# EAGLE board supply (EAGLE 4.16)

Size 160 x 100 mm. Coordinates in mm from the lower left corner, seen from the top.
Outline: 0,0 160,0 160,100 0,100 0,0
Copper layers (1*16): Top 0.035mm / dielectric 1.5mm / Bottom 0.035mm
Design rules "default": minimum track width 10mil, minimum drill 24mil, track to track 8mil, track to pad 8mil, pad to pad 8mil, via to via 8mil, smd to smd 8mil, copper to edge 40mil, drill to drill 8mil, minimum pad ring 10mil, minimum via ring 8mil, stop-mask expansion 4mil, vias tented up to drill 0mil, thermal gap 10mil

## Footprints (pad centres in the part's own frame; a part is rotated, then mirrored left to right if it is on the bottom)
CAP2.5 = drill 0.813 pad 1.6 octagon: 1 -2.54,0; 2 0,0
C1206 = smd 1.6 x 1.8: 1 -1.4,0; 2 1.4,0
C0805K = smd 1.3 x 1.6: 1 -1,0; 2 1,0
E3,5-10 = drill 0.813 pad 1.6 round: + -1.778,0 | drill 0.813 pad 1.6 octagon: - 1.778,0
PANASONIC_E = smd 3.8 x 1.4: + 3,0; - -3,0
PANASONIC_D = smd 3 x 1.4: + 2.4,0; - -2.4,0
SOT23 = smd 1 x 1.4: 1 -0.95,-1.1; 2 0.95,-1.1; 3 0,1.1
SMB = smd 2.4 x 2.4: A 2.2,0; C -2.2,0
DIL_TRACO_DCDC = drill 0.813 long: 1 -13.97,-7.62; 2 -11.43,-7.62; 3 -8.89,-7.62; 9 6.35,-7.62; 10 8.89,-7.62; 11 11.43,-7.62; 12 13.97,-7.62; 13 13.97,7.62; 14 11.43,7.62; 15 8.89,7.62; 16 6.35,7.62; 22 -8.89,7.62; 23 -11.43,7.62; 24 -13.97,7.62
DC_DC_TRACO_1W_DUAL = drill 0.9 round: 1 -5.08,3.81; 2 -2.54,3.81; 3 2.54,3.81; 4 5.08,3.81; 5 7.62,3.81
SOT23-5 = smd 0.6 x 1.2: 1 -0.95,-1.306; 2 0,-1.306; 3 0.95,-1.306; 4 0.95,1.306; 5 -0.95,1.306
SO8 = smd 0.6 x 2.2: 1 -1.905,-2.6; 2 -0.635,-2.6; 3 0.635,-2.6; 4 1.905,-2.6; 5 1.905,2.6; 6 0.635,2.6; 7 -0.635,2.6; 8 -1.905,2.6
SO14W = smd 0.6 x 2.2: 1 -3.81,-4.6; 2 -2.54,-4.6; 3 -1.27,-4.6; 4 0,-4.6; 5 1.27,-4.6; 6 2.54,-4.6; 7 3.81,-4.6; 8 3.81,4.6; 9 2.54,4.6; 10 1.27,4.6; 11 0,4.6; 12 -1.27,4.6; 13 -2.54,4.6; 14 -3.81,4.6
78LXX = drill 0.813 octagon: GND 0,1.905; IN 1.27,0; OUT -1.27,0
SNR-V = drill 1.3 round: 11 7.62,1.27; 12 2.54,1.27; 14 12.7,1.27 | drill 1 round: A1 -12.7,1.27; A2 -8.89,1.27
L5650M = smd 1.8 x 4: 1 -2.5,0; 2 2.5,0
IND_KOA_330U = smd 2 x 1: P$1 0,0; P$2 0,2.5; P$3 0,5; P$4 0,7.5; P$5 12.5,0; P$6 12.5,2.5; P$7 12.5,5; P$8 12.5,7.5
1206 = smd 1.6 x 1.803: A -1.422,0; C 1.422,0
AMP1_2_DC = drill 1.9 round: 1 9.15,16.72; 2 13.34,16.73 | hole 3.2: 4.62,12.49; 17.88,12.49
NEB25R = drill 0.813 pad 2.54 long: + 0,7.35; - 0,1.35; C 4.9,4.4
DPAK = smd 1.6 x 2.997: 1 -2.261,-4.928; 3 2.21,-4.928 | smd 4.826 x 4.191: 4 0,3.353
R0805W = smd 1.5 x 1: 1 -0.94,0; 2 0.94,0
R2010W = smd 2 x 1.8: 1 -2.311,0; 2 2.311,0
M0805 = smd 1.3 x 1.6: 1 -0.95,0; 2 0.95,0
TESTPAD = drill 1.321 pad 2.159 octagon: 1 0,0

## Placement (x,y rotation side)
C1  47u/50  [CAP2.5]  -52.71,56.35 0 top  (outside the outline)
C2  47u/50  [CAP2.5]  -62.87,56.35 0 top  (outside the outline)
C3  100n  [C1206]  -31.12,66.51 0 top  (outside the outline)
C4  100n  [C1206]  -42.55,66.51 0 top  (outside the outline)
C5  47u/25  [CAP2.5]  -73.03,56.35 0 top  (outside the outline)
C6  47u/25  [CAP2.5]  -83.19,56.35 0 top  (outside the outline)
C7  47u/25  [CAP2.5]  -93.35,56.35 0 top  (outside the outline)
C8  100n  [C1206]  -53.98,66.51 0 top  (outside the outline)
C9  100n  [C1206]  -65.41,66.51 0 top  (outside the outline)
C10  100n  [C1206]  -76.84,66.51 0 top  (outside the outline)
C11  100n  [C1206]  -88.27,66.51 0 top  (outside the outline)
C12  100n  [C0805K]  -74.3,74.13 0 top  (outside the outline)
C13  220p  [C1206]  -99.7,66.51 0 top  (outside the outline)
C14  470p  [C1206]  -111.13,66.51 0 top  (outside the outline)
C15  NM  [C1206]  -122.56,66.51 0 top  (outside the outline)
C16  470p  [C1206]  -18.42,74.13 0 top  (outside the outline)
C17  220uF  [E3,5-10]  -22.23,47.46 0 top  (outside the outline)
C18  100p  [C1206]  -29.85,74.13 0 top  (outside the outline)
C19  330uF  [E3,5-10]  -37.47,47.46 0 top  (outside the outline)
C20  100n  [C1206]  -41.28,74.13 0 top  (outside the outline)
C21  100u/50V  [PANASONIC_E]  -104.78,46.19 0 top  (outside the outline)
C22  220u/16V  [PANASONIC_D]  -106.05,57.62 0 top  (outside the outline)
C23  100n  [C0805K]  -84.46,74.13 0 top  (outside the outline)
C24  100n  [C0805K]  -94.62,74.13 0 top  (outside the outline)
C25  470uF  [E3,5-10]  -52.71,47.46 0 top  (outside the outline)
C26  100n  [C0805K]  -104.78,74.13 0 top  (outside the outline)
C27  100n  [C0805K]  -114.94,74.13 0 top  (outside the outline)
C28  4u7  [E3,5-10]  -67.95,47.46 0 top  (outside the outline)
D1  BZX84-C12  [SOT23]  -128.91,46.19 0 top  (outside the outline)
D2  15MQ040  [SMB]  -118.75,57.62 0 top  (outside the outline)
D3  BAS16  [SOT23]  -118.75,46.19 0 top  (outside the outline)
D4  LL4001G  [SMB]  -131.45,57.62 0 top  (outside the outline)
IC1  DC_DC_TRACO_8W  [DIL_TRACO_DCDC]  -32.39,14.44 0 top  (outside the outline)
IC2  DC_DC_TRACO_1W_DUAL  [DC_DC_TRACO_1W_DUAL]  -117.48,30.95 0 top  (outside the outline)
IC3  LM4120  [SOT23-5]  -78.11,46.19 0 top  (outside the outline)
IC4  LTC1622  [SO8]  -85.73,34.76 0 top  (outside the outline)
IC5  LM2574M-5  [SO14W]  -109.86,9.36 0 top  (outside the outline)
IC6  L7805CP  [78LXX]  -43.82,56.35 0 top  (outside the outline)
K1  SNR03024  [SNR-V]  -60.33,33.49 0 top  (outside the outline)
L1  3u3H  [L5650M]  -89.54,46.19 0 top  (outside the outline)
L2  330uH  [IND_KOA_330U]  -69.22,4.28 0 top  (outside the outline)
LED1  [1206]  -52.71,74.13 0 top  (outside the outline)
P1  [AMP1_2_DC]  -137.8,-8.42 0 top  (outside the outline)
P2  NEB25R  [NEB25R]  -94.62,8.09 0 top  (outside the outline)
Q1  IRFR5305  [DPAK]  -79.38,10.63 0 top  (outside the outline)
Q2  BSS123  [SOT23]  -18.42,57.62 0 top  (outside the outline)
Q3  BSS123  [SOT23]  -28.58,57.62 0 top  (outside the outline)
R1  10k  [R0805W]  -126.37,74.13 0 top  (outside the outline)
R2  10k  [R0805W]  -19.69,81.75 0 top  (outside the outline)
R3  2k2  [R0805W]  -31.12,81.75 0 top  (outside the outline)
R4  2k2  [R0805W]  -42.55,81.75 0 top  (outside the outline)
R5  0R  [R2010W]  -18.42,66.51 0 top  (outside the outline)
R6  2k2  [R0805W]  -53.98,81.75 0 top  (outside the outline)
R7  2k2  [R0805W]  -65.41,81.75 0 top  (outside the outline)
R8  180R  [M0805]  -64.14,74.13 0 top  (outside the outline)
T1  IRF7422  [SO8]  -97.16,34.76 0 top  (outside the outline)
U$240  TESTPAD  [TESTPAD]  -19.69,34.76 0 top  (outside the outline)
U$398  TESTPAD  [TESTPAD]  -33.66,34.76 0 top  (outside the outline)

## Library data of the parts
C1 C2 C5-C7 D3 IC1 IC2 IC4 IC5 L2 P1 Q1 T1 = sc-librari
C3 C4 C8-C28 L1 R1-R8 = rcl
D1 D2 D4 = diode
IC3 U$240 U$398 = lbm
IC6 = v-reg
K1 = relay
LED1 = led
P2 = con-lumberg
Q2 Q3 = transistor-small-signal

## Nets
0V: C1.2 C2.2 C3.2 C4.2 C5.2 C6.2 C7.1 C8.2 C9.2 C10.1 C11.2 C12.1 C12.2 C13.2 C14.2 C15.2 C16.2 C17.- C18.2 C19.- C20.2 C25.- C26.1 C27.1 C28.- IC1.2 IC1.3 IC1.10 IC1.12 IC1.13 IC1.15 IC1.16 IC2.2 IC2.4 IC3.2 IC4.6 IC6.GND P1.2 P2.+ Q2.2 Q3.2 R3.1 R7.1 T1.1 T1.2 U$240.1
+3V3: C19.+ C20.1 C25.+ C26.2 D4.C IC6.IN L1.2 R6.2
+5V: C6.1 C9.1 C11.1 IC2.5 IC3.3 IC3.4
+24S: K1.11
+24V: C1.1 C3.1 C5.1 C8.1 C21.+ C24.2 D3.3 IC1.1 IC1.22 IC1.23 IC1.24 IC2.1 IC5.10 K1.14 K1.A1 Q1.4
-5V: C7.2 C10.2 IC2.3
GND: C21.- C22.- C23.1 C24.1 D2.A IC5.4 IC5.5 IC5.6 R8.2
N$11: D3.1 K1.A2 Q3.3
N$29: D4.A P2.-
N$52: D2.C IC5.12 L2.P$1
N$55: LED1.C R8.1
N$148: D1.3 P1.1 Q1.3 R1.2
N$149: Q2.3 R2.1
N$152: Q1.1 R1.1 R2.2
N$153: D1.1 Q2.1 R3.2
N$155: IC4.1 R5.1 T1.3
N$156: IC4.7 T1.4
N$158: IC4.2 R4.1
N$159: C13.1 R4.2
N$160: L1.1 T1.5 T1.6 T1.7 T1.8
N$161: C14.1 IC4.4
N$162: C18.1 IC4.3 R6.1 R7.2
N$307: IC3.1
N$308: IC4.5
N$309: K1.12
REF: IC3.5
RELAY_24V: Q3.1
VCC: C2.1 C4.1 C15.1 C16.1 C17.+ C22.+ C23.2 C27.2 C28.+ IC1.11 IC1.14 IC4.8 IC5.3 IC6.OUT L2.P$4 LED1.A R5.2 U$398.1

## Tracks (layer width: path | path; a pad name or v marks a point on that pad's centre or on a via)
0V  (45 unrouted)
+3V3  (7 unrouted)
+5V  (5 unrouted)
+24V  (15 unrouted)
-5V  (2 unrouted)
GND  (8 unrouted)
N$11  (2 unrouted)
N$29  (1 unrouted)
N$52  (2 unrouted)
N$55  (1 unrouted)
N$148  (3 unrouted)
N$149  (1 unrouted)
N$152  (2 unrouted)
N$153  (2 unrouted)
N$155  (2 unrouted)
N$156  (1 unrouted)
N$158  (1 unrouted)
N$159  (1 unrouted)
N$160  (4 unrouted)
N$161  (1 unrouted)
N$162  (3 unrouted)
VCC  (17 unrouted)